# Altium PCB DCDC_MP2451DT_VCC3.3_PCB.PcbDoc
Units mil, origin at the board's own origin, x right, y up, seen from the top; angles counter-clockwise.
Board outline not stored, 2 copper layers (Top Layer, Bottom Layer); 11 components, 0 nets, 26 pads, 11 vias.
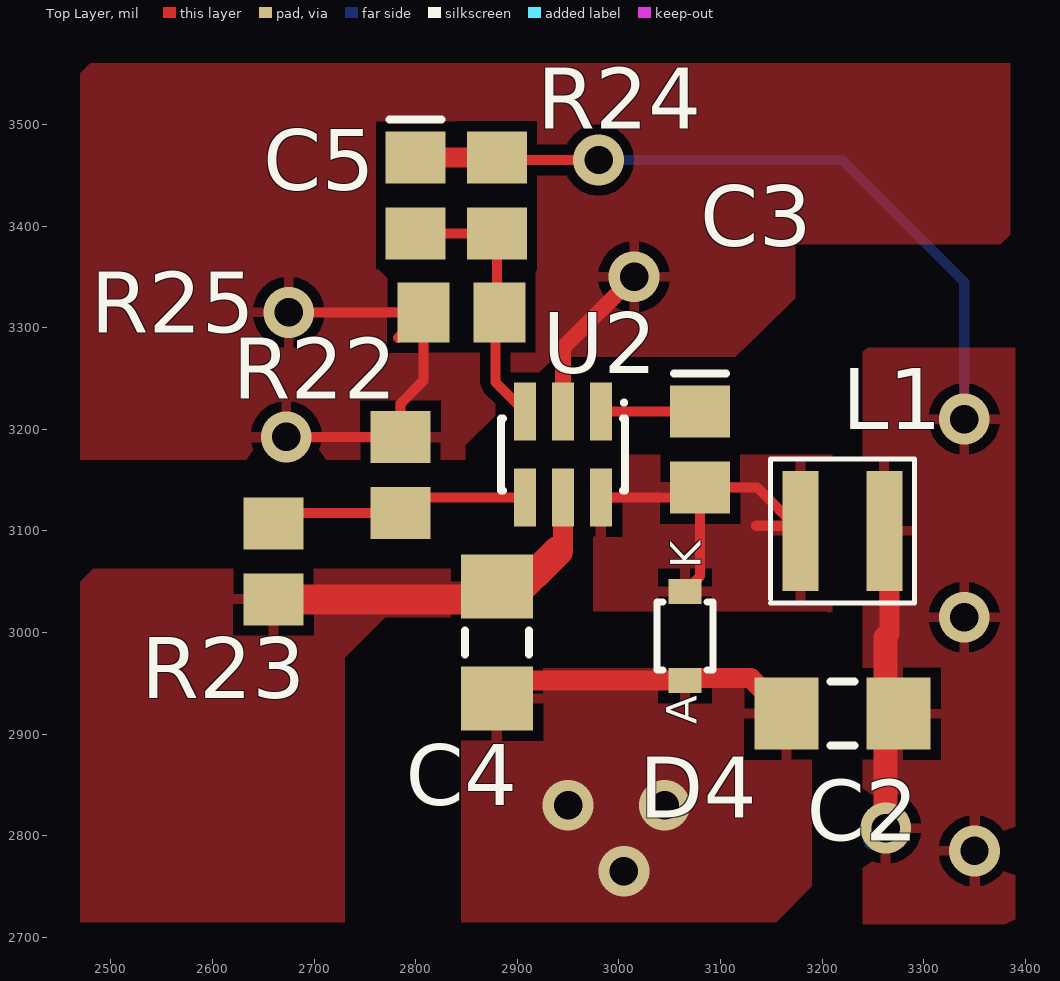
[diagram p0: Top Layer view]
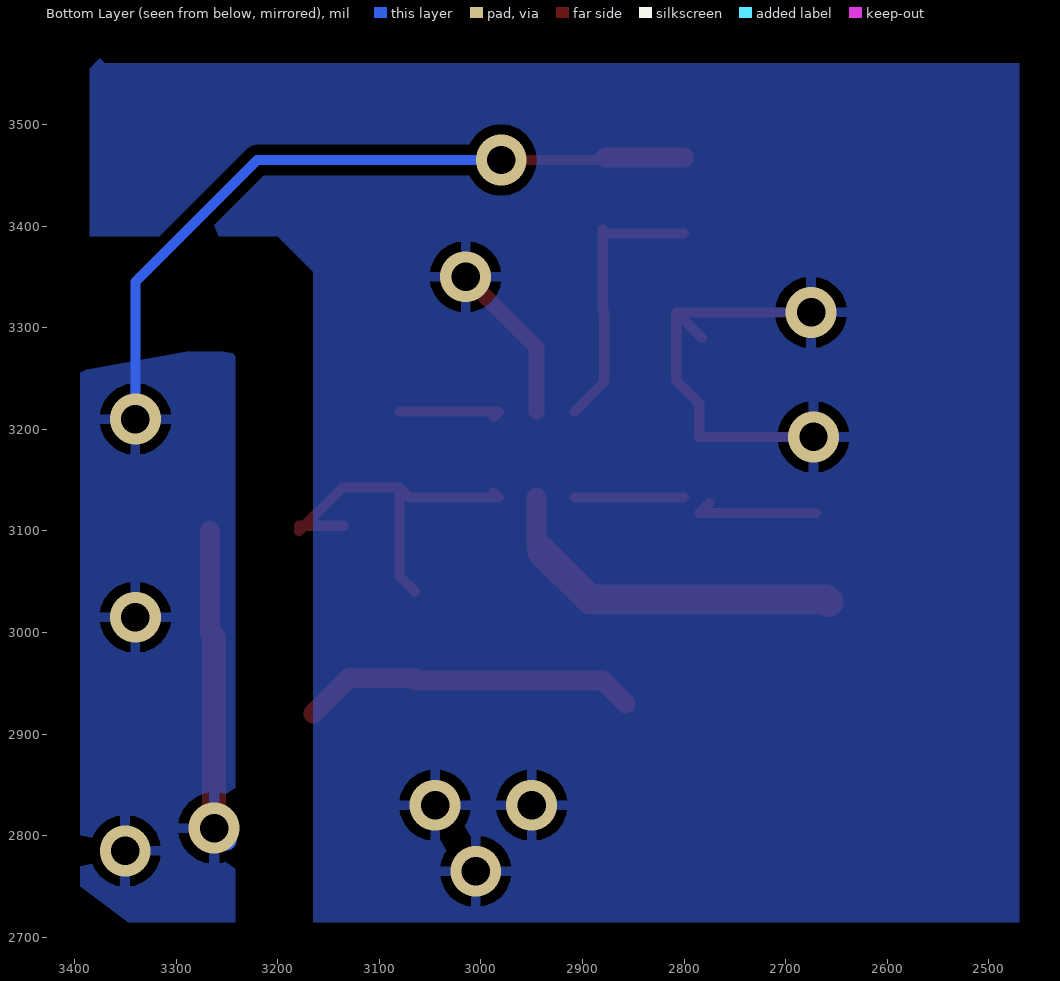
[diagram p1: Bottom Layer view, seen from below]

## Layer stack, top to bottom
Top Layer: signal copper 1.4
Dielectric: dielectric 12.6, FR-4, Dk 4.8
Bottom Layer: signal copper 1.4

## Components (designator, comment, footprint, x,y, rotation, side; value= is the part's Value field where it differs from the comment)
C2 "Cap" 3216[1206] 3220,2920 r180 top
C3 "Cap" C0805 3080,3180 r270 top
C4 "Cap" 3216[1206] 2880,2990 r90 top
C5 "Cap" C0805 2800,3430 r270 top
D4 "PMEG3010BBA" SOD-123W 3065,2952.6 r90 top
L1 "Inductor" NRH3010T150MN 3220,3100 r0 top
R22 "Res1" 2012[0805] 2785,3155 r90 top
R23 "Res1" 2012[0805] 2660,3070 r90 top
R24 "Res1" 2012[0805] 2880,3430 r90 top
R25 "Res1" 2012[0805] 2845,3315 r0 top
U2 "MP2451DT" SOT23-6 2945,3175 r180 top

## Footprints (in the part's own frame and the unit in brackets; to place one, negate y for a bottom-side part, rotate by r counter-clockwise, add the part's x,y. Pads: shape width x height; smd on the part's side, far side on the other; paste and mask are expansions set on the pad)
2012[0805] [mm] "Chip Resistor; Body 2.0 x 1.3 mm (LxW typ)"
  rect 1.3x1.5 smd: 1(-0.95,0) 2(0.95,0)
3216[1206] [mm] "Chip Resistor; Body 3.2 x 1.6 mm (LxW typ)"
  rect 1.6x1.8 smd: 1(-1.4,0) 2(1.4,0)
  silkscreen extent -0.3,-0.8 0.3,0.8
C0805 [mm] "Chip Capacitor; Body 2.0 x 1.2 mm (LxW typ)"
  rect 1.3x1.5 smd: 1(-0.95,0) 2(0.95,0)
  silkscreen extent -1.9,-0.65 -1.9,0.65
NRH3010T150MN [mm]
  rect 0.9x3 smd: 1(-1.05,0) 2(1.05,0)
  silkscreen extent -1.8,-1.8 1.8,1.8
SOD-123W [mm]
  rect 0.63x0.83 smd: 1(0,0) 2(2.23,0)
  silkscreen extent 0.27,-0.7 1.96,0.7
SOT23-6 [mm] "SOT-23/SC-74A; 5 Leads; Body 3.1 x 3 mm, inc. leads (LxW max)"
  rect 0.55x1.45 smd: 1(-0.95,-1.075) 2(0,-1.075) 3(0.95,-1.075) 4(0.95,1.075) 5(0,1.075) 6(-0.95,1.075)
  silkscreen extent -1.58,-1.35 1.55,0.9

## Part data
C2 C3 C4 C5: "Capacitor"
D4: library part Diode, "Default Diode"
R22 R23 R24 R25: "Resistor"
U2: library part MCP16301T/CHY

## Via types
v1: diameter 50, hole 28, Top Layer to Bottom Layer, 11 vias

## Nets (pads, with @x,y where several pads share a name; then routed paths per layer and width w, separated by ;. In a path a pad name is that pad's centre, name@x,y a point inside that pad or via, vN(x,y) a via of type N, cw(c..) or ccw(c..) an arc to the next point about the centre after c; other vN are vias at no path point)
pads on no net: C2.1 C2.2 C3.1 C3.2 C4.1 C4.2 C5.1 C5.2 D4.1 D4.2 L1.1 L1.2 R22.1 R22.2 R23.1 R23.2 R24.1 R24.2 R25.1 R25.2 U2.1 U2.2 U2.3 U2.4 U2.5 U2.6
copper on no net: | length 3285.9
  Top Layer w10: 2670.2,3117.6 2785,3117.6 2775.2,3127.4 ; v1(2672.6,3192.4) 2785,3192.4 2785,3225 2807.6,3247.6 2807.6,3315 ; v1(2675,3315) 2807.6,3315 ; 2782.6,3290 2807.6,3315 ; 2800,3392.6 2876.06,3392.6 2880,3396.54 2880,3316.54 2878.46,3315 2878.46,3246.46 2907.6,3217.32 ; 2800.08,3132.68 2907.6,3132.68 ; 2882.4,3465 v1(2980,3465) ; 2982.4,3217.32 2987.32,3212.4 ; 2982.48,3217.4 3080,3217.4 ; 2987.32,3137.6 2982.4,3132.68 3070.08,3132.68 3080,3142.6 ; 3065,3040.39 3080,3055.39 3080,3142.6 ; 3135,3105 3178.67,3105 ; 3178.66,3100 3136.06,3142.6 3080,3142.6 ; 3262.4,2995 3266.34,2998.94
  Top Layer w15.75: 2945,3217.32 2945,3280 v1(3015,3350)
  Top Layer w19.68: 2800,3467.4 2877.4,3467.4 ; 2857.4,2930 2880,2952.6 3065,2952.6 ; 2940,3080 2945,3085 2945,3132.68 ; 3065,2955 3129.88,2955 3164.88,2920 ; v1@3262.4,2807.4 v1(3262.6,2807.4) ; 3266.34,2998.94 3266.34,3100
  Top Layer w23.62: v1@3262.4,2807.4 3262.4,2995
  Top Layer w29.53: 2657.79,3030 2660.2,3032.4 2892.4,3032.4 2940,3080
  Bottom Layer w10: v1(2980,3465) 3220,3465 3340,3345 v1(3340,3210)
  Bottom Layer w19.68: v1@3250.2,2795 v1(3262.6,2807.4)
  other v1: 3005,2765 3350,2785 2950,2830 3045,2830 3340,3015

## Polygon pours and split planes (outlines as drawn)
no net on Top Layer "Bottom Layer-No Net" (solid, remove dead copper): 2975,3157.22 2975,3175 3210,3175 3210,3015 3204.78,3020.93 2975,3020.93 2975,3175
no net on Top Layer "Bottom Layer-No Net" (solid, remove dead copper): 2845,2965 3190,2965 3190,2750 3155,2715 2845,2715 2845,2965
no net on Top Layer "Bottom Layer-No Net" (solid, remove dead copper): 2470,3050 2482.52,3062.52 2922.52,3062.52 2927.48,3062.52 2935,3055 2930,3050 2930,3015 2770,3015 2735,2980 2730,2975 2730,2715 2470,2715 2470,3050
no net on Top Layer "Bottom Layer-No Net" (solid, remove dead copper): 3245,3280 3390,3280 3390,2705 3380,2712.82 3240,2712.82 3240,3276.09 3245,3280
no net on Top Layer "Bottom Layer-No Net" (solid, remove dead copper): 2848.79,3170 2470,3170 2470,3550.37 2479.84,3560 3385,3560 3385,3391.48 3375.16,3381.85 3173.47,3381.85 3173.47,3328.89 3139.03,3295.19 3114.44,3271.11 3050.48,3271.11 2937.34,3271.11 2848.79,3184.44 2848.79,3170
no net on Bottom Layer "Bottom Layer-No Net" (solid, remove dead copper, pour order 1001): 3241.72,3285 3253.45,3276.16 3394.14,3276.16 3394.14,2750.35 3382.41,2741.51 3347.24,2715 3241.72,2715 3241.72,3271.74 3230,3280.58 3235.86,3285 3400,3285 3400,3267.33 3388.28,3258.49
no net on Bottom Layer "Bottom Layer-No Net" (solid, remove dead copper): 2470,3560 3370,3560 3375,3565 3385,3555 3385,3390 3200,3390 3190,3380 3165,3355 3165,2715 2470,2715 2470,3560

## Text inside footprints (layer, text, board x,y; h text height)
D4: Top Overlay "K" at 3080.75,3063.42 h30 r90; Top Overlay "A" at 3076.81,2909.88 h30 r90